# EAGLE board teensy-jst_01.2 v30 (EAGLE 9.7.0)
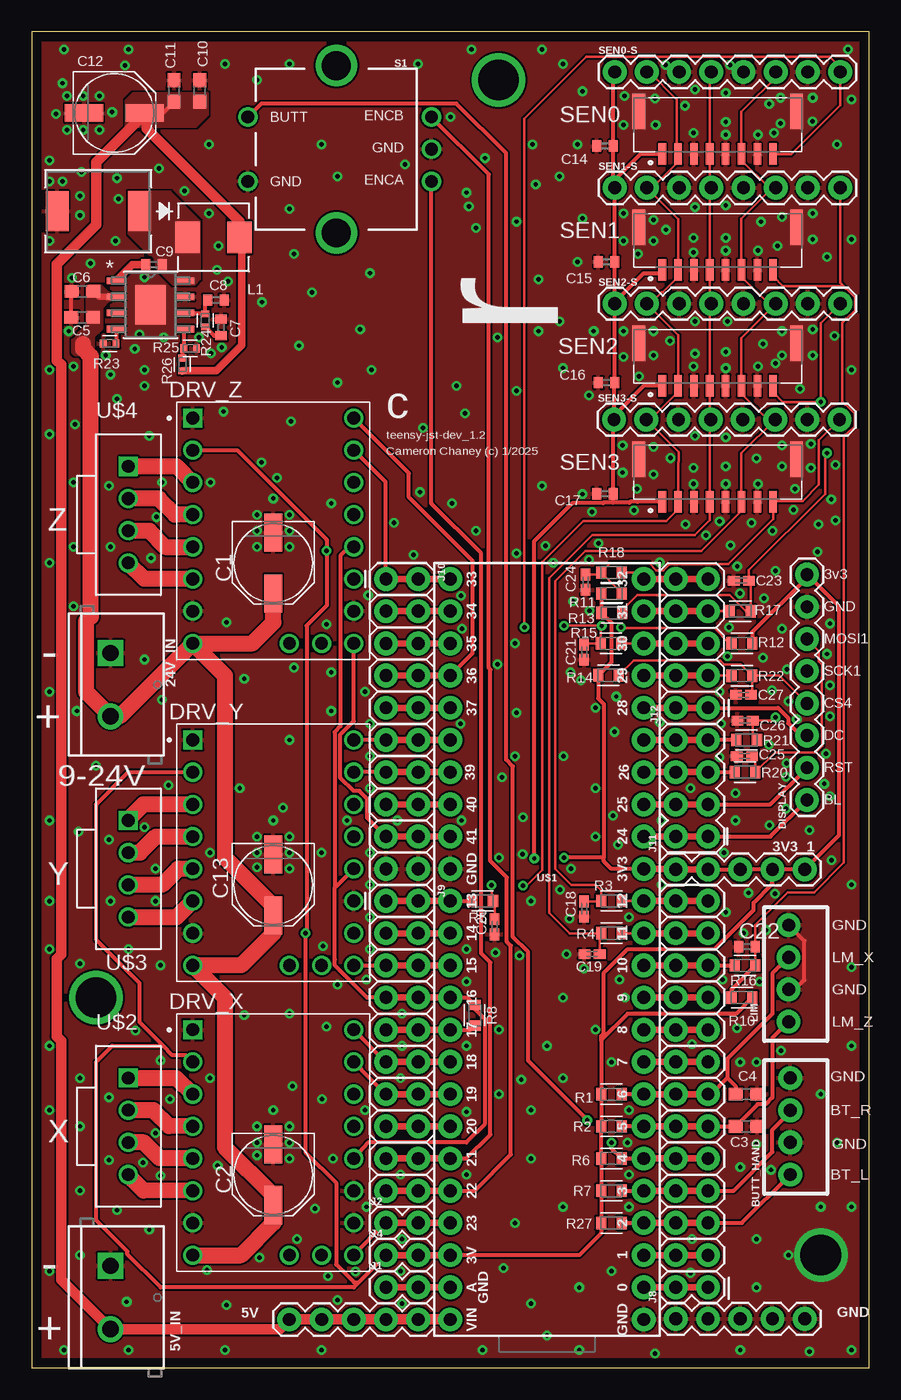
[diagram p0: board, top side]
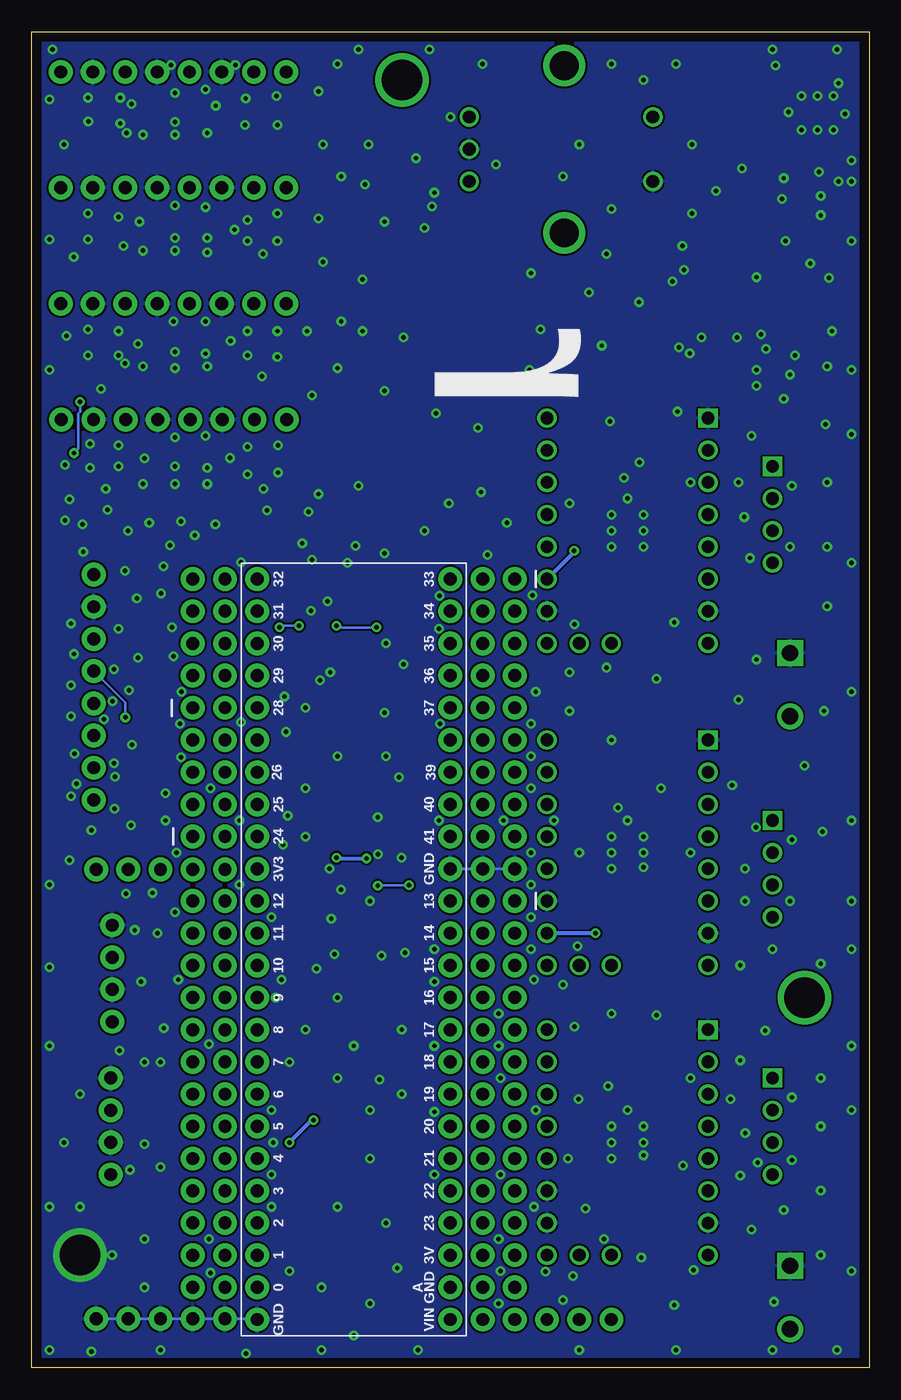
[diagram p1: board, bottom side, seen from below]

Size 66.04 x 105.41 mm. Coordinates in mm from the lower left corner, seen from the top.
Outline: 66.04,105.41 0,105.41 0,0 66.04,0 66.04,105.41
Copper layers (1*16): Top 0.035mm / dielectric 1.5mm / Bottom 0.035mm
Design rules "Fusion Electronics Design Rules *": minimum track width 6mil, minimum drill 0.35mm, track to track 6mil, track to pad 6mil, pad to pad 6mil, via to via 6mil, smd to smd 6mil, copper to edge 30mil, drill to drill 6mil, minimum pad ring 10mil, minimum via ring 8mil, stop-mask expansion 4mil, vias tented up to drill 0mil, thermal gap 6mil

## Footprints (pad centres in the part's own frame; a part is rotated, then mirrored left to right if it is on the bottom)
1X05 = drill 1.016 pad 1.88: 1 0,0; 2 2.54,0; 3 5.08,0; 4 7.62,0; 5 10.16,0
SCREWTERMINAL-5MM-2 = drill 1.3 pad 2.032 square: 1 0,0 | drill 1.3 pad 2.032: 2 5,0
1X04_NO_SILK = drill 1.016 pad 1.88: 1 0,0; 2 2.54,0; 3 5.08,0; 4 7.62,0
PANASONIC_D = smd 3 x 1.4: + 2.4,0; - -2.4,0
C0603 = smd 1.1 x 1: 1 -0.85,0; 2 0.85,0
C0402 = smd 0.7 x 0.9: 1 -0.65,0; 2 0.65,0
C0402K = smd 0.925 x 0.74: 1 -0.6,0; 2 0.6,0
SMC_DIO-L = smd 1.799 x 3.129: 1 -3.241,0; 2 3.241,0
1X08 = drill 1.016 pad 1.88: 1 0,0; 2 2.54,0; 3 5.08,0; 4 7.62,0; 5 10.16,0; 6 12.7,0; 7 15.24,0; 8 17.78,0
MODULE_TMC2209_BIGTREETECH = drill 1 square: 1 -6.35,8.89 | drill 1: 2 -6.35,6.35; 3 -6.35,3.81; 4 -6.35,1.27; 5 -6.35,-1.27; 6 -6.35,-3.81; 7 -6.35,-6.35; 8 -6.35,-8.89; 9 6.35,8.89; 10 6.35,6.35; 11 6.35,3.81; 12 6.35,1.27; 13 6.35,-1.27; 14 6.35,-3.81; 15 6.35,-6.35; 16 6.35,-8.89; 17 1.27,-8.89; 18 3.81,-8.89
1X02 = drill 1.016 pad 1.88: 1 0,0; 2 2.54,0
2X13 = drill 1.016 pad 1.88: 1 0,0; 2 0,2.54; 3 2.54,0; 4 2.54,2.54; 5 5.08,0; 6 5.08,2.54; 7 7.62,0; 8 7.62,2.54; 9 10.16,0; 10 10.16,2.54; 11 12.7,0; 12 12.7,2.54; 13 15.24,0; 14 15.24,2.54; 15 17.78,0; 16 17.78,2.54; 17 20.32,0; 18 20.32,2.54; 19 22.86,0; 20 22.86,2.54; 21 25.4,0; 22 25.4,2.54; 23 27.94,0; 24 27.94,2.54; 25 30.48,0; 26 30.48,2.54
2X10 = drill 1.016 pad 1.88: 1 0,0; 2 0,2.54; 3 2.54,0; 4 2.54,2.54; 5 5.08,0; 6 5.08,2.54; 7 7.62,0; 8 7.62,2.54; 9 10.16,0; 10 10.16,2.54; 11 12.7,0; 12 12.7,2.54; 13 15.24,0; 14 15.24,2.54; 15 17.78,0; 16 17.78,2.54; 17 20.32,0; 18 20.32,2.54; 19 22.86,0; 20 22.86,2.54
2X4 = drill 1.016 pad 1.88: 1 -3.81,-1.27; 2 -3.81,1.27; 3 -1.27,-1.27; 4 -1.27,1.27; 5 1.27,-1.27; 6 1.27,1.27; 7 3.81,-1.27; 8 3.81,1.27
2X5 = drill 1.016 pad 1.88: 1 0,0; 2 0,2.54; 3 2.54,0; 4 2.54,2.54; 5 5.08,0; 6 5.08,2.54; 7 7.62,0; 8 7.62,2.54; 9 10.16,0; 10 10.16,2.54
MWSA0503S-100MT = smd 1.9 x 2.499: 1 2.05,0; 2 -2.05,0
RESC1608X60 = smd 0.799 x 0.974: 1 -0.815,0; 2 0.815,0
RESC1005X40 = smd 0.535 x 0.644: 1 -0.507,0; 2 0.507,0
ROTARY_ENC_PLAIN = drill 1.016: A 7.493,-2.54; B 7.493,2.54; C 7.493,0; SW+ -6.985,2.54; SW- -6.985,-2.54 | drill 2.286: P$3 0,6.604; P$4 0,-6.604
JST_BM08B-GHS-TBT(LF)(SN)(N) = smd 0.6 x 1.7: 1 4.375,0; 2 3.125,0; 3 1.875,0; 4 0.625,0; 5 -0.625,0; 6 -1.875,0; 7 -3.125,0; 8 -4.375,0 | smd 1 x 2.8: P1 -6.225,-3.35; P2 6.225,-3.35
DDA8_3P1X2P4_TEX = smd 1.46 x 0.533: 1 -2.724,1.905; 2 -2.724,0.635; 3 -2.724,-0.635; 4 -2.724,-1.905; 5 2.724,-1.905; 6 2.724,-0.635; 7 2.724,0.635; 8 2.724,1.905 | smd 2.4 x 3.1: EPAD 0,0
TEENSY_EXTENDED = drill 1.016 pad 1.88: 0 7.62,-13.97; 1 7.62,-11.43; 2 7.62,-8.89; 3 7.62,-6.35; 3.3V@1 7.62,19.05; 3V -7.62,-11.43; 4 7.62,-3.81; 5 7.62,-1.27; 6 7.62,1.27; 7 7.62,3.81; 8 7.62,6.35; 9 7.62,8.89; 10 7.62,11.43; 11 7.62,13.97; 12 7.62,16.51; 13 -7.62,16.51; 14 -7.62,13.97; 15 -7.62,11.43; 16 -7.62,8.89; 17 -7.62,6.35; 18 -7.62,3.81; 19 -7.62,1.27; 20 -7.62,-1.27; 21 -7.62,-3.81; 22 -7.62,-6.35; 23 -7.62,-8.89; 24 7.62,21.59; 25 7.62,24.13; 26 7.62,26.67; 27 7.62,29.21; 28 7.62,31.75; 29 7.62,34.29; 30 7.62,36.83; 31 7.62,39.37; 32 7.62,41.91; 33 -7.62,41.91; 34 -7.62,39.37; 35 -7.62,36.83; 36 -7.62,34.29; 37 -7.62,31.75; 38 -7.62,29.21; 39 -7.62,26.67; 40 -7.62,24.13; 41 -7.62,21.59; AGND -7.62,-13.97; GND1 7.62,-16.51; GND2 -7.62,19.05; VIN -7.62,-16.51
HX25418-4A = drill 1 square: 1 0,3.81 | drill 1: 2 0,1.27; 3 0,-1.27; 4 0,-3.81

## Placement (x,y rotation side)
3V3_1  [1X05]  50.8,39.32 0 top
5V  [1X05]  20.32,3.81 0 top
5V_IN  [SCREWTERMINAL-5MM-2]  6.22,8.05 270 top
24V_IN  [SCREWTERMINAL-5MM-2]  6.22,56.39 270 top
BUTT_HAND  [1X04_NO_SILK]  59.82,15.24 90 top
C1  100uF/50V  [PANASONIC_D]  19.05,63.5 270 top
C2  100uF/50V  [PANASONIC_D]  19.05,15.24 270 top
C3  100nF  [C0603]  56.36,19.05 0 top
C4  100nF  [C0603]  56.36,21.59 0 top
C5  2.2uF  [C0603]  3.99,82.87 180 top
C6  2.2uF  [C0603]  4,84.91 180 top
C7  6.8nF  [C0402]  14.94,82.07 90 top
C8  39pF  [C0402]  14.53,84.23 0 top
C9  100nF  [C0402]  9.64,87.03 0 top
C10  47uF  [C0603]  13.26,100.74 90 top
C11  47uF  [C0603]  11.22,100.74 90 top
C12  100uF/50V  [PANASONIC_D]  6.53,99 0 top
C13  100uF/50V  [PANASONIC_D]  19.05,38.1 270 top
C14  100nF  [C0402]  45.21,96.39 180 top
C15  100nF  [C0402]  45.34,87.25 180 top
C16  100nF  [C0402]  45.34,77.72 180 top
C17  100nF  [C0402]  45.21,68.96 180 top
C18  100pF  [C0402K]  43.56,36.2 90 top  (not fitted)
C19  100pF  [C0402K]  44.2,32.64 0 top  (not fitted)
C20  100pF  [C0402K]  36.51,34.8 90 top  (not fitted)
C21  100pF  [C0402K]  43.56,56.46 90 top  (not fitted)
C22  100pF  [C0402]  56.4,33.22 0 top  (not fitted)
C23  100pF  [C0402K]  55.97,62.1 0 top  (not fitted)
C24  100pF  [C0402K]  43.69,61.98 90 top  (not fitted)
C25  100pF  [C0402K]  56.21,48.26 0 top  (not fitted)
C26  100pF  [C0402K]  56.26,51.05 0 top  (not fitted)
C27  100pF  [C0402K]  56.13,53.09 0 top  (not fitted)
CR1  B560C-13-FSMC_DIO-L  [SMC_DIO-L]  5.26,91.25 180 top
DISPLAY  [1X08]  61.15,62.58 270 top
DRV_X  TMC2209_BIGTREETECH  [MODULE_TMC2209_BIGTREETECH]  19.05,17.78 0 top
DRV_Y  TMC2209_BIGTREETECH  [MODULE_TMC2209_BIGTREETECH]  19.05,40.64 0 top
DRV_Z  TMC2209_BIGTREETECH  [MODULE_TMC2209_BIGTREETECH]  19.05,66.04 0 top
GND  [1X05]  50.8,3.86 0 top
J1  [1X02]  27.94,6.35 0 top
J2  [1X02]  27.94,11.43 0 top
J4  [1X02]  27.94,8.89 0 top
J8  [2X13]  53.34,6.35 90 top
J9  [2X10]  27.94,36.83 270 top
J10  [2X10]  27.94,62.23 270 top
J11  [2X4]  52.07,45.72 90 top
J12  [2X5]  53.34,52.07 90 top
L1  10uH  [MWSA0503S-100MT]  14.34,89.18 180 top
LIM  [1X04_NO_SILK]  59.69,27.3 90 top
R1  10k  [RESC1608X60]  45.72,21.59 180 top
R2  10k  [RESC1608X60]  45.72,19.05 180 top
R3  0R  [RESC1608X60]  45.72,36.83 0 top
R4  100  [RESC1608X60]  45.72,34.29 0 top
R5  100  [RESC1608X60]  35.56,36.83 180 top
R6  10k  [RESC1608X60]  45.72,16.51 180 top
R7  10k  [RESC1608X60]  45.72,13.97 180 top
R8  1k  [RESC1608X60]  34.92,27.81 90 top
R10  10k  [RESC1608X60]  56.01,29.21 180 top
R11  10k  [RESC1608X60]  45.72,61.09 0 top
R12  10k  [RESC1608X60]  56.01,57.15 180 top
R13  10k  [RESC1608X60]  45.75,59.56 0 top
R14  10k  [RESC1608X60]  45.49,54.64 0 top
R15  100  [RESC1608X60]  45.7,57.15 0 top
R16  100  [RESC1608X60]  56.26,31.75 180 top
R17  100  [RESC1608X60]  55.88,59.69 180 top
R18  100  [RESC1608X60]  45.72,62.74 0 top
R20  100  [RESC1608X60]  56.26,46.99 180 top
R21  100  [RESC1608X60]  56.39,49.53 180 top
R22  100  [RESC1608X60]  56.01,54.61 180 top
R23  100k  [RESC1005X40]  6.14,80.8 0 top
R24  13k  [RESC1005X40]  13.69,82.63 90 top
R25  51k  [RESC1005X40]  12.49,80.42 180 top
R26  270k  [RESC1005X40]  11.88,79.15 270 top
R27  10k  [RESC1608X60]  45.72,11.43 180 top
S1  ENCODER-SWITCH  [ROTARY_ENC_PLAIN]  24.03,96.14 0 top
SEN0  BM08B-GHS-TBT(LF)(SN)(N)  [JST_BM08B-GHS-TBT(LF)(SN)(N)]  54.1,95.76 180 top
SEN0-S  [1X08]  45.97,102.23 0 top
SEN1  BM08B-GHS-TBT(LF)(SN)(N)  [JST_BM08B-GHS-TBT(LF)(SN)(N)]  54.1,86.61 180 top
SEN1-S  [1X08]  45.97,93.09 0 top
SEN2  BM08B-GHS-TBT(LF)(SN)(N)  [JST_BM08B-GHS-TBT(LF)(SN)(N)]  54.1,77.47 180 top
SEN2-S  [1X08]  45.97,83.95 0 top
SEN3  BM08B-GHS-TBT(LF)(SN)(N)  [JST_BM08B-GHS-TBT(LF)(SN)(N)]  54.1,68.33 180 top
SEN3-S  [1X08]  45.93,74.8 0 top
U1  TPS54360DDARDDA8_3P1X2P4_TEX  [DDA8_3P1X2P4_TEX]  9.38,83.85 0 top
U$1  TEENSY_EXTENDEDW_SILK  [TEENSY_EXTENDED]  40.64,20.32 0 top
U$2  HX25418-4A  [HX25418-4A]  7.62,19.05 0 top
U$3  HX25418-4A  [HX25418-4A]  7.62,39.37 0 top
U$4  HX25418-4A  [HX25418-4A]  7.62,67.31 0 top

## Library data of the parts
3V3_1 5V GND J1 J2 J4 J8-J11 = SparkFun-Connectors
5V_IN 24V_IN = SparkFun-Connectors; SF_SKU: PRT-08432
BUTT_HAND LIM = SparkFun-Connectors; PROD_ID: CONN-09696
C1-C27 = rcl; SPICEPREFIX: C
CR1 = 2024-09-23_20-34-24_Library; COPYRIGHT: Copyright (C) 2024 Ultra Librarian. All rights reserved.; MANUFACTURER_PART_NUMBER: B560C-13-F; MFR_NAME: Diodes Inc
DISPLAY SEN0-S SEN1-S SEN2-S SEN3-S = SparkFun-Connectors; PROD_ID: CONN-08438
DRV_X DRV_Y DRV_Z = TMC2209_BIGTREETECH; AVAILABILITY: In Stock; CHECK_PRICES: https://www.snapeda.com/parts/TMC2209%20SILENTSTEPSTICK/Trinamic+Motion+Control+GmbH/view-part/?ref=eda; DESCRIPTION: TMC2209 Motor Controller/Driver Power Management Evaluation Board; MF: Trinamic Motion Control GmbH; MP: TMC2209 SILENTSTEPSTICK; PACKAGE: None; PRICE: None; SNAPEDA_LINK: https://www.snapeda.com/parts/TMC2209%20SILENTSTEPSTICK/Trinamic+Motion+Control+GmbH/view-part/?ref=snap
J12 = SparkFun-Connectors; PROD_ID: CONN-08499; SF_ID: PRT-0778
L1 = rcl-buck
R1-R8 R10-R18 R20-R27 = Resistor; CATEGORY: Resistor; SUB-CATEGORY: Fixed
S1 = SparkFun-Switches-Encoder; SF_SKU: COM-09117
SEN0 SEN1-SEN3 = BM08B-GHS-TBT_LF__SN__N_; AVAILABILITY: In Stock; CHECK_PRICES: https://www.snapeda.com/parts/BM08B-GHS-TBT(LF)(SN)(N)/JST+Sales+America+Inc./view-part/?ref=eda; DESCRIPTION: Connector Header Surface Mount 8 position 0.049 (1.25mm); MF: JST Sales; MP: BM08B-GHS-TBT(LF)(SN)(N); PACKAGE: None; PRICE: None; SNAPEDA_LINK: https://www.snapeda.com/parts/BM08B-GHS-TBT(LF)(SN)(N)/JST+Sales+America+Inc./view-part/?ref=snap
U1 = 2024-09-23_20-06-51_Library; COPYRIGHT: Copyright (C) 2024 Ultra Librarian. All rights reserved.; MANUFACTURER_PART_NUMBER: TPS54360DDAR; MFR_NAME: Texas Instruments
U$1 = TEENSY-4.1_CLEAN
U$2-U$4 = HX25418-4A

## Nets
+3V3: 3V3_1.1 3V3_1.2 3V3_1.3 3V3_1.4 3V3_1.5 C14.1 C15.1 C16.1 C17.1 DISPLAY.1 DRV_X.2 DRV_Y.2 DRV_Y.15 DRV_Z.2 DRV_Z.14 J4.1 J4.2 R1.2 R2.2 R6.2 R7.2 R10.1 R11.1 R12.1 R13.1 R14.1 R27.2 SEN0-S.1 SEN0.1 SEN1-S.1 SEN1.1 SEN2-S.1 SEN2.1 SEN3-S.1 SEN3.1 U$1.3.3V@1 U$1.3V
+5V: 5V.1 5V.2 5V.3 5V.4 5V.5 5V_IN.2 C10.1 C11.1 C12.+ L1.2 R26.2 U$1.VIN
+24V: 24V_IN.2 C1.+ C2.+ C5.1 C6.1 C13.+ DRV_X.8 DRV_Y.8 DRV_Z.8 U1.2
BL: DISPLAY.8 J11.1 J11.2 U$1.24
BUTT_ENC: J8.9 J8.10 R6.1 S1.SW+ U$1.4
BUTT_HAND_L: BUTT_HAND.1 J8.5 J8.6 R27.1 U$1.2
BUTT_HAND_R: BUTT_HAND.3 J8.7 J8.8 R7.1 U$1.3
CS0: C21.2 R12.2 R15.1 SEN0-S.8 SEN0.8
CS0_M: J12.5 J12.6 R15.2 U$1.30
CS1: C22.2 R10.2 R16.1 SEN1-S.8 SEN1.8
CS1_M: J8.21 J8.22 R16.2 U$1.10
CS2: C23.2 R13.2 R17.1 SEN2-S.8 SEN2.8
CS2_M: J12.7 J12.8 R17.2 U$1.31
CS3: C24.2 R11.2 R18.1 SEN3-S.8 SEN3.8
CS3_M: J12.9 J12.10 R18.2 U$1.32
CS4: C27.2 DISPLAY.5 R14.2 R22.1
CS4_M: J12.3 J12.4 R22.2 U$1.29
DC: DISPLAY.6 J12.1 J12.2 U$1.28
DIR_X: DRV_X.9 J9.11 J9.12 U$1.18
DIR_Y: DRV_Y.9 J10.11 J10.12 U$1.38
DIR_Z: DRV_Z.9 J10.7 J10.8 U$1.36
EN_X: DRV_X.16 J2.1 J2.2 U$1.23
EN_Y: DRV_Y.16 J9.5 J9.6 U$1.15
EN_Z: DRV_Z.16 J10.17 J10.18 U$1.41
ENCA: J9.17 J9.18 S1.A U$1.21
ENCB: J9.19 J9.20 S1.B U$1.22
GND: 5V_IN.1 24V_IN.1 BUTT_HAND.2 BUTT_HAND.4 C1.- C2.- C3.2 C4.2 C5.2 C6.2 C7.2 C8.2 C10.2 C11.2 C12.- C13.- C14.2 C15.2 C16.2 C17.2 C18.1 C19.1 C20.1 C21.1 C22.1 C23.1 C24.1 C25.1 C26.1 C27.1 CR1.2 DISPLAY.2 DRV_X.1 DRV_X.7 DRV_X.14 DRV_X.15 DRV_Y.1 DRV_Y.7 DRV_Y.14 DRV_Z.1 DRV_Z.7 DRV_Z.15 GND.1 GND.2 GND.3 GND.4 GND.5 J10.19 J10.20 LIM.2 LIM.4 R23.1 R25.1 S1.C S1.SW- SEN0-S.3 SEN0-S.5 SEN0-S.7 SEN0.3 SEN0.5 SEN0.7 SEN0.P1 SEN0.P2 SEN1-S.3 SEN1-S.5 SEN1-S.7 SEN1.3 SEN1.5 SEN1.7 SEN1.P1 SEN1.P2 SEN2-S.3 SEN2-S.5 SEN2-S.7 SEN2.3 SEN2.5 SEN2.7 SEN2.P1 SEN2.P2 SEN3-S.3 SEN3-S.5 SEN3-S.7 SEN3.3 SEN3.5 SEN3.7 SEN3.P1 SEN3.P2 U1.7 U1.EPAD U$1.GND1 U$1.GND2
LIM_X: C4.1 J8.13 J8.14 LIM.3 R1.1 U$1.6
LIM_Z: C3.1 J8.11 J8.12 LIM.1 R2.1 U$1.5
MISO: C18.2 R3.1 SEN0-S.6 SEN0.6 SEN1-S.6 SEN1.6 SEN2-S.6 SEN2.6 SEN3-S.6 SEN3.6
MISO1: J8.3 J8.4 U$1.1
MISO_M: J8.25 J8.26 R3.2 U$1.12
MOSI: C19.2 R4.1 SEN0-S.4 SEN0.4 SEN1-S.4 SEN1.4 SEN2-S.4 SEN2.4 SEN3-S.4 SEN3.4
MOSI1: C25.2 DISPLAY.3 R20.1
MOSI1_M: J11.5 J11.6 R20.2 U$1.26
MOSI_M: J8.23 J8.24 R4.2 U$1.11
MS1_Z: J10.9 J10.10 U$1.37
N$1: J10.15 J10.16 U$1.40
N$3: J9.3 J9.4 U$1.14
N$4: J1.1 J1.2 U$1.AGND
N$7: R23.2 U1.4
N$8: J8.15 J8.16 U$1.7
N$10: C7.1 R24.1
N$12: DRV_Z.6 U$4.4
N$14: C8.1 R24.2 U1.6
N$15: DRV_Z.5 U$4.3
N$17: DRV_X.6 U$2.4
N$18: DRV_X.5 U$2.3
N$19: R25.2 R26.1 U1.5
N$20: DRV_Z.4 U$4.2
N$21: DRV_Z.3 U$4.1
N$23: DRV_Y.4 U$3.2
N$24: DRV_X.4 U$2.2
N$25: DRV_X.3 U$2.1
N$26: J9.15 J9.16 U$1.20
N$28: J9.9 J9.10 R8.1 U$1.17
N$29: DRV_Y.3 U$3.1
N$30: C9.2 CR1.1 L1.1 U1.8
N$32: C9.1 U1.1
N$33: J8.17 J8.18 U$1.8
N$36: DRV_Y.6 U$3.4
N$37: J8.1 J8.2 U$1.0
N$38: DRV_Y.5 U$3.3
N$39: J8.19 J8.20 U$1.9
N$41: J10.5 J10.6 U$1.35
RST: DISPLAY.7 J11.3 J11.4 U$1.25
RX_X: DRV_X.13 DRV_Y.13 DRV_Z.13 J9.7 J9.8 R8.2 U$1.16
RX_Z: J10.3 J10.4 U$1.34
SCK: C20.2 R5.1 SEN0-S.2 SEN0.2 SEN1-S.2 SEN1.2 SEN2-S.2 SEN2.2 SEN3-S.2 SEN3.2
SCK1: C26.2 DISPLAY.4 R21.1
SCK1_M: J11.7 J11.8 R21.2 U$1.27
SCK_M: J9.1 J9.2 R5.2 U$1.13
STP_X: DRV_X.10 J9.13 J9.14 U$1.19
STP_Y: DRV_Y.10 J10.13 J10.14 U$1.39
STP_Z: DRV_Z.10 J10.1 J10.2 U$1.33

## Tracks (layer width: path | path; a pad name or v marks a point on that pad's centre or on a via)
+3V3  (via drill 0.35)
  Top 0.305: 3V3_1.2 3V3_1.3 3V3_1.4 | 3V3_1.4 3V3_1.5 63.63,41.99 63.63,60.09 DISPLAY.1 61.14,62.36 56.82,58.04 R12.1 56.74,57.06 | 44.91,25.86 R1.2 R2.2 R6.2 R7.2 R27.2 44.91,10.62 43.18,8.89 U$1.3V | U$1.3.3V@1 45.72,39.37 45.13,39.96 45.13,40.26 | 44.91,60.77 R11.1 44.94,61.06 R13.1 45.72,58.78 45.72,55.65 44.68,54.61 | R10.1 55.55,27.94 46.99,27.94 44.91,25.86 | J4.1 25.78,6.73 | 25.78,6.73 25.4,6.35 10.16,6.35 7.54,8.97 7.54,9.19 5.08,11.65 5.08,24.13 6.35,25.4 10.36,25.4 | 10.36,25.4 11.09,24.67 12.11,24.67 DRV_X.2 | DRV_Y.2 7.62,46.99 5.08,44.45 5.08,33.77 8.51,30.34 8.51,27.25 10.36,25.4 | 44.91,25.86 44.91,26.16 45.13,26.39 45.13,31.16 47.02,33.05 53.86,33.05 56.93,36.12 56.93,36.69 58.42,38.18 3V3_1.4 | R14.1 44.68,54.61 | 44.68,54.61 44.68,52.81 45.13,52.35 45.13,40.26 | 45.93,83.9 SEN2-S.1 45.97,87.23 C15.1 45.99,93.08 SEN1-S.1 | SEN2.1 48.26,77.47 45.93,75.14 | 45.93,75.14 45.93,74.93 | SEN1.1 49.47,86.36 48.26,86.36 45.93,84.03 45.93,83.9 | SEN0.1 48.01,95.76 45.97,93.73 SEN1-S.1 | SEN1-S.1 45.86,93.2 C14.1 45.86,102.12 SEN0-S.1 | SEN3-S.1 45.93,74.93 | 45.93,75.14 45.93,77.66 C16.1 45.99,83.84 45.93,83.9 | 45.86,68.25 C17.1 45.86,74.86 45.93,74.93 | 45.13,40.26 v41.99,40.26 | 45.86,68.25 45.08,68.25 45.04,68.21 42.65,68.21 39.61,65.17 39.61,40.24 39.63,40.21 v39.63,40.19 | DRV_Z.2 16.21,72.39 23.25,65.34 v23.25,64.45 23.25,60.13 21.67,58.55 21.67,34.29 v21.59,34.29 21.59,17.02 24.01,14.6 24.01,8.16 25.43,6.73 25.78,6.73 | 45.86,68.25 47.13,68.25 47.21,68.33 47.78,68.33 47.79,68.33 SEN3.1
  Top 0.508: U$1.3.3V@1 50.75,39.37 3V3_1.1 3V3_1.2 | J4.1 J4.2 U$1.3V
  Bottom 0.305: v21.59,34.29 DRV_Y.15 | v41.99,40.26 41.91,40.26 41.84,40.19 v39.63,40.19 | DRV_Z.14 23.25,64.38 v23.25,64.45
+5V
  Top 0.305: 11.22,100.11 C11.1 10.33,99 9.06,99
  Top 0.61: L1.2 16.56,89.01 16.56,80.7 14.54,78.68 11.92,78.68 R26.2
  Top 0.813: U$1.VIN 5V.5 5V.4 5V.3 5V.2 5V.1 19.56,3.05 5V_IN.2 2.33,6.94 2.33,25.79 1.96,26.16 1.96,32.27 2.33,32.63 2.33,79.13 1.98,79.47 1.98,87.07 5.08,90.17 5.08,95.12 8.95,99 C12.+ 9.06,99 9.06,97.77 16.39,90.45 L1.2
  pour Top (isolate 0.254, no thermals): 7.36,97.9 12.97,97.9 13.94,98.87 13.94,100.54 7.95,100.54 7.36,99.95
+24V
  Top 0.305: 4.87,82.83 C5.1
  Top 0.508: C6.1 5.28,84.49 U1.2
  Top 1.27: 4.06,80.77 4.06,80.39 4.67,79.78 4.67,59.26 4.29,58.88 4.29,53.32 24V_IN.2 6.94,51.39 DRV_Z.8 | DRV_Z.8 17.4,57.15 19.05,58.8 C1.+ | DRV_Z.8 15.24,54.61 15.24,40.26 19.05,36.45 C13.+ 19.05,34.29 16.51,31.75 DRV_Y.8 15.24,29.21 15.24,17.4 19.05,13.59 C2.+ 19.05,11.43 16.51,8.89 DRV_X.8
  pour Top (isolate 0.254, no thermals): 4.62,82.17 4.56,82.08 3.5,81.02 3.5,80.2 4.6,80.2 4.6,81.37 4.62,81.47 4.68,81.56 5.23,82.12 5.23,83.65 5.26,83.76 5.31,83.85 5.89,84.43 5.99,84.49 6,84.49 5.99,84.49 5.89,84.54 5.34,85.1 4.65,85.1 4.65,82.28
BL
  Top 0.305: J11.1 58.25,41.91 DISPLAY.8
  Top 0.508: U$1.24 J11.2 J11.1
BUTT_ENC  (via drill 0.35)
  Top 0.305: U$1.4 R6.1 45.72,17.32 v45.72,17.78 | S1.SW+ 18.12,99.75 33.5,99.75 37.42,95.83 37.42,47.98 37.94,47.46 37.94,34.01 39.15,32.8 39.15,24.22 v43.81,19.56
  Top 0.508: U$1.4 J8.10 J8.9
  Bottom 0.305: v45.72,17.78 43.94,19.56 v43.81,19.56
BUTT_HAND_L
  Top 0.305: J8.5 56.01,11.43 BUTT_HAND.1 | R27.1 U$1.2
  Top 0.508: U$1.2 J8.6 J8.5
BUTT_HAND_R
  Top 0.305: R7.1 U$1.3 | J8.7 55.36,13.97 58.42,17.03 58.42,18.78 59.82,20.18 BUTT_HAND.3
  Top 0.508: J8.7 J8.8 U$1.3
CS0  (via drill 0.35)
  Top 0.203: v38.86,58.42 38.86,98.55 43.74,103.43 62.94,103.43 63.75,102.62 SEN0-S.8 63.75,99.6 59.91,95.76 SEN0.8 | R12.2 55.03,57.15 53.83,58.34 46.56,58.34 v46.48,58.42 | v41.99,58.55 v44.96,58.55 44.88,58.47 R15.1 43.65,57.15 C21.2
  Bottom 0.203: v38.86,58.42 41.86,58.42 v41.99,58.55 | v44.96,58.55 46.36,58.55 v46.48,58.42
CS0_M
  Top 0.203: R15.2 U$1.30
  Top 0.508: J12.5 J12.6 U$1.30
CS1
  Top 0.203: 64.01,85.34 59.24,85.34 58.48,86.11 SEN1.8 | SEN1-S.8 63.75,85.6 64.01,85.34 | 64.01,85.34 64.21,85.14 64.25,85.14 64.95,84.44 64.95,83.45 64.25,82.75 64.21,82.75 63.93,82.47 63.93,76.23 64.16,76 64.2,76 64.9,75.3 64.9,74.31 64.2,73.61 64.16,73.61 64.04,73.48 64.04,39.86 61.7,37.52 59.61,37.52 57.05,34.96 C22.2 57.08,33.2 R16.1
  Top 0.305: R16.1 55.19,29.87 R10.2
CS1_M
  Top 0.305: J8.21 R16.2
  Top 0.508: U$1.10 J8.22 J8.21
CS2  (via drill 0.35)
  Top 0.203: SEN2-S.8 62.23,82.42 v62.23,76.2 59.24,76.2 58.48,76.96 SEN2.8 | R13.2 46.57,59.77 47.75,60.96 55.04,60.96 56.31,59.69 R17.1 56.69,61.98 C23.2 56.57,62.92 62.58,68.93 62.58,72.04 v62.71,72.17
  Bottom 0.203: v62.23,76.2 62.23,75.43 62.36,75.3 62.36,72.51 v62.71,72.17
CS2_M
  Top 0.203: R17.2 J12.7
  Top 0.508: U$1.31 J12.8 J12.7
CS3
  Top 0.203: SEN3-S.8 62.08,73.17 62.08,69.68 60.8,68.4 58.55,68.4 SEN3.8 58.48,66.95 54.95,63.42 50.31,63.42 49.79,62.91 49.27,62.91 48.7,63.48 45.65,63.48 R18.1 | R18.1 46.53,61.11 R11.2 | C24.2 44.74,62.58 R18.1
CS3_M
  Top 0.203: R18.2 47.75,62.74
  Top 0.508: J12.9 J12.10 U$1.32 47.75,62.74
CS4
  Top 0.203: R14.2 47.47,55.8 54.3,55.8 54.6,55.5 55.93,55.5 R22.1 | R22.1 58.96,54.61 DISPLAY.5 | C27.2 56.82,53.17 R22.1
CS4_M
  Top 0.203: R22.2 J12.3
  Top 0.508: U$1.29 J12.4 J12.3
DC
  Top 0.305: J12.1 58.86,52.07 59.65,51.28 59.65,50.87 60.64,49.88 DISPLAY.6
  Top 0.508: U$1.28 J12.2 J12.1
DIR_X
  Top 0.305: DRV_X.9 27.89,24.13 J9.11
  Top 0.508: J9.11 J9.12 U$1.18
DIR_Y
  Top 0.305: J10.11 DRV_Y.9
  Top 0.508: U$1.38 J10.12 J10.11
DIR_Z
  Top 0.305: U$1.36 33.02,54.63 34.77,56.38 34.77,63.66 29.74,68.69 29.74,70.59 DRV_Z.9
  Top 0.508: U$1.36 J10.8 J10.7
EN_X
  Top 0.305: DRV_X.16 27.83,11.43 J2.1
  Top 0.508: J2.1 J2.2 U$1.23
EN_Y
  Top 0.305: DRV_Y.16 J9.5
  Top 0.508: J9.5 J9.6 U$1.15
EN_Z
  Top 0.305: J10.17 26.46,43.39 26.46,44.89 25.84,45.51 25.38,45.51 24.34,46.55 24.34,49.97 25.4,51.03 DRV_Z.16
  Top 0.508: J10.17 J10.18 U$1.41
ENCA
  Top 0.305: U$1.21 34.29,16.51 36.17,18.39 36.17,31.98 35.45,32.71 35.45,64.28 31.53,68.2 S1.A
  Top 0.508: J9.17 J9.18 U$1.21
ENCB
  Top 0.305: U$1.22 34.92,13.97 37.78,16.83 37.78,33.3 37.47,33.62 37.47,38.69 36.18,39.98 36.18,55.09 36.05,55.22 36.05,94.16 S1.B
  Top 0.508: U$1.22 J9.20 J9.19
GND  (via drill 0.35, 3.2)
  Top 0.203: C10.2 13.26,101.27
  Top 0.305: C5.2 3.13,84.89 C6.2 | LIM.2 60.18,29.84 60.94,30.6 60.94,33.68 LIM.4
  Bottom 0.203: J10.19 J10.20 U$1.GND2 | U$1.GND1 48.31,3.86 GND.1 GND.2 GND.3 GND.4 GND.5
  other vias: 8.89,55.88 41.91,22.86 39.37,16.51 39.37,5.08 14.15,80.04 55.88,15.83 58.55,97.41 54.74,98.3 54.74,89.15 52.2,89.15 58.8,88.52 58.67,79.25 54.74,80.14 52.32,80.01 54.74,71.12 52.2,70.99 60.2,69.34 63.5,96.52 55.63,26.8 8.89,77.47 34.16,75.31 20.32,102.87 40.26,69.6 15.11,75.44 64.65,38.1 64.65,12.7 64.65,25.4 29.42,94.95 33.49,77.47 13.97,96.52 8.89,78.74 34.29,92.71 26.67,86.36 41.91,102.87 19.05,20.32 23.24,58.67 20.32,27.94 62.23,8.89 59.1,25.02 62.72,87.63 4.64,87.14 34.47,91.62 39.96,85.85 39.96,81.79 41.63,93.98 41.63,82.55 20.91,10.16 57.15,24.13 55.88,24.13 62.23,21.59 63.5,17.78 62.23,12.7 59.69,8.89 57.15,6.35 57.15,10.16 41.91,12.7 38.1,11.43 39.37,20.32 36.86,26.67 34.29,33.02 34.29,30.48 41.91,29.21 42.16,32.64 39.37,36.83 40.64,25.4 44.45,26.67 45.72,24.13 46.79,29.21 45.72,7.62 43.18,6.35 40.64,2.54 35.56,1.39 22.86,1.39 55.88,1.39 43.18,1.39 64.65,1.39 15.24,1.39 7.62,1.39 2.54,1.39 3.81,8.89 3.81,13.97 3.81,19.05 3.81,22.86 1.39,20.32 1.39,25.4 1.39,7.62 1.39,73.66 1.39,63.5 1.39,53.34 1.39,43.18 1.39,36.83 1.39,33.02 1.39,78.74 1.39,95.25 2.54,104.02 7.62,104.02 15.24,102.87 17.78,101.6 24.13,93.98 22.86,96.52 20.32,91.44 30.48,102.87 38.61,22.73 45.97,50.16 45.85,43.56 46.1,52.96 44.45,52.07 44.45,45.72 44.45,41.91 38.1,48.26 56.77,66.67 55.12,64.9 60.07,67.69 58.67,62.87 57.66,56.01 54.25,48.16 54.36,50.8 55.5,45.34 55.5,43.18 46.23,41.27 49.66,43.18 61.98,64.39 64.65,31.62 64.65,78.74 64.64,89.03 64.65,100.08 64.39,104.02 40.26,104.02 34.67,104.02 47.88,78.23 41.91,78.87 44.32,81.79 43.05,87.25 43.43,90.68 50.04,89.79 57.66,80.77 57.53,90.42 47.75,69.34 57.15,71.75 60.58,77.22 57.75,60.71 30.1,64.14 23.62,54.86 23.62,51.82 24.13,30.23 22.99,33.27 23.24,26.92 20.57,22.23 19.81,44.2 10.16,31.75 7.62,33.02 3.68,42.29 3.81,31.88 5.08,47.5 9.27,10.92 6.73,12.45 10.92,21.21 9.78,36.83 9.78,39.37 10.29,69.85 9.27,73.53 6.73,93.85 6.6,88.9 14.6,86.61 13.97,91.06 10.03,94.61 8.13,80.39 10.41,81.28 14.99,80.52 15.49,85.72 14.73,88.52 6.86,92.2 3.94,94.36 3.81,90.93 7.37,102.74 6.35,99.06 2.41,101.35 12.06,92.84 20.7,87.88 18.16,84.07 25.91,81.92 24.13,77.72 21.08,80.64 20.45,74.68 33.15,68.2 26.8,78.74 56.13,34.29 56.52,37.47 54.74,35.94 46.74,100.33 58.17,99.69 49.02,70.48 49.02,72.64 59.18,72.77 59.18,71.12 61.59,81.92 61.59,79.88 59.18,79.88 59.18,81.79 49.02,81.79 49.02,79.88 49.02,88.9 49.02,90.55 61.59,91.06 61.59,89.03 59.18,90.81 61.59,100.2 59.05,100.2 59.05,98.17 49.21,98.04 49.16,100.15 2.41,93.6 1.39,93.6 1.39,88.9 3.81,92.46 8.51,81.53 8.89,86.05 13.21,81.28 57.28,88.14 54.74,88.14 52.2,88.01 52.2,97.41 54.74,97.28 57.28,97.28 57.28,78.99 54.74,78.87 52.2,78.99 57.28,69.72 54.74,69.72 52.2,69.72 46.61,72.77 47.8,87.88 46.66,98.04 46.61,70.63 46.67,88.9 46.67,91.06 46.67,79.76 46.67,81.79 43.05,96.52 43.43,100.71 43.94,76.71 38.23,51.69 38.23,64.26 38.23,77.09 38.23,90.42 36.86,40.26 33.83,50.8 35.74,95.43 43.57,31.5 42.49,54.86 44.01,59.71 36.59,32.77 38.47,32.51 38.75,43.43 36.73,55.5 36.73,81.28 54.23,53.34 58.13,49.15 42.7,60.46 43.31,54.23 59.54,47.69 62.04,66.55 58.2,42.82 59.5,44.12 59.48,46.64 62.5,46.06 59.18,58.29 9.84,67.12 9.4,63.88 8.9,42.66 10.16,15.17 8.78,16.19 9.77,18.51 63.07,40.05 8.19,26.61 20.32,49.53 22.86,40.64 38.1,57.15 30.84,74.17 43.43,68.93 33.87,60.92 33.93,58.32 33.91,43.18 37.08,46.61 28.57,66.67 34.29,15.24 34.29,20.19 34.29,25.4 22.91,21.21 36.86,21.59 10.16,24.26 10.79,45.97 10.29,52.7 14.1,69.85 52.32,73.53 54.74,73.41 52.32,82.55 54.86,82.55 52.32,91.57 54.74,91.69 52.32,100.84 54.74,100.58 47.12,15.24 47.12,12.7 46.99,17.78 47.12,20.32 46.35,30.61 47.12,35.56 54.61,40.64 58.29,15.62 26.29,53.34 26.54,60.96 23.62,68.2 26.67,35.56 26.67,33.02 26.67,38.1 26.67,40.64 24.85,43.18 26.67,48.26 26.67,45.72 26.67,50.8 16.41,45.72 14.07,40.64 14.07,22.86 13.83,7.72 17.97,8.7 20.32,19.05 20.32,17.78 20.32,16.51 17.78,17.78 17.78,19.05 20.32,39.37 20.32,40.64 20.32,41.91 17.78,41.91 17.78,40.64 19.05,43.18 20.32,64.77 20.32,66.04 20.32,67.31 17.78,67.31 17.78,66.04 17.78,64.77 19.05,68.58 18.11,71.45 19.33,70.23 14.67,15.94 17.78,16.76 17.78,39.5 5.33,100.33 4.06,100.33 2.79,100.33 2.79,97.66 4.06,97.66 5.33,97.66 1.9,98.93 61.58,98.32 55.06,102.77 49.98,102.77 39.49,96.52 51.52,99.57 63.3,81.41 63.41,71.25 63.41,66.85 62.95,58.72 62.95,53.85 62.95,51.41 60.34,51.15 62.95,45.09 63.06,68.51 61.44,70.99 61.44,72.9 58.44,66.02 38.72,40.51 40.51,64.86 47.5,67.65 44.2,67.52 41.94,48.26 58.61,37.4 50.39,71.77 62.72,56.31 62.65,48.46 58.37,53.45 50.34,81.03 55.85,61.09 59.67,52.6 59.56,55.12 55.64,63.23 41.13,63.52 49.53,63.54 44.7,65.06 53.18,65.69 54.26,66.77 51.56,66.55 43.94,63.75 54.48,30.61 57.4,30.48 57.91,34.54 42.42,35.43 41.66,37.72 42.55,39.37 49.66,38.1 28.83,43.18 26.29,20.32 23.75,16.51 20.7,55.24 15.37,58.8 16.76,54.36 16.76,27.81 37.21,7.87 39.75,93.34 35.05,89.92 22.1,84.84 29.21,5.08 29.08,7.62 29.21,10.16 25.53,7.61 29.08,15.24 29.08,22.86 29.21,25.4 29.21,27.94 26.42,30.61 54.99,58.42 49.53,50.93 51.94,45.72 61.34,42.42 52.07,25.53 57.15,17.65 61.34,1.27 49.15,1.14 30.61,69.09 35.05,66.04 3.56,51.82 2.92,81.79 3.17,85.98 6.73,76.45 6.22,78.36 3.3,60.07 3.3,78.99 3.3,69.85 3.3,64.77 3.43,74.42 5.84,79.88 23.37,7.24 6.1,41.66 6.22,36.83 6.1,21.34 6.1,16.38 6.1,69.6 6.22,64.77 51.94,7.49 52.07,10.16 54.86,56.13 33.02,98.68 15.37,4.95 24.13,5.33 7.49,5.21 26.42,12.7 22.35,12.57
  pour Top (rank 2): -6.29,-6.2 77.32,-6.2 77.32,110.34 -7.47,110.34 -7.47,-5.02
  pour Bottom: -8.83,-11.28 82.4,-11.28 82.4,109.16 81.22,110.34 -10.01,110.34 -10.01,-10.1
LIM_X
  Top 0.305: 54.86,22.86 54.86,24.38 58.42,27.94 58.42,31.11 LIM.3 | U$1.6 R1.1 | 53.59,21.59 54.86,22.86 | 54.86,22.86 55.51,22.21 C4.1
  Top 0.508: U$1.6 J8.14 J8.13 53.59,21.59
LIM_Z
  Top 0.305: U$1.5 R2.1 | J8.11 C3.1 57.25,20.79 57.89,20.79 58.42,21.32 58.42,26.04 LIM.1
  Top 0.508: J8.11 J8.12 U$1.5
MISO
  Top 0.203: SEN1-S.6 58.42,93.09 | 58.42,93.09 58.17,93.09 55.98,95.28 SEN0.6 55.98,99.08 59,102.11 58.88,102.23 SEN0-S.6 | 58.42,93.09 55.98,90.65 SEN1.6 55.98,86.1 58.13,83.95 SEN2-S.6 55.98,81.25 SEN2.6 55.98,76.87 58.04,74.8 SEN3-S.6 55.98,72.15 SEN3.6 55.98,67.59 52.81,64.43 43.66,64.43 41.3,62.07 41.3,39.34 42.55,38.1 44.45,38.1 44.91,37.65 R3.1 44.87,36.8 C18.2
MISO1
  Top 0.508: J8.3 J8.4 U$1.1
MISO_M
  Top 0.203: R3.2 U$1.12
  Top 0.508: U$1.12 J8.26 J8.25
MOSI
  Top 0.203: 53.48,92.97 53.48,92.71 | 53.48,92.71 SEN1.4 53.48,84.06 SEN2-S.4 53.48,83.83 SEN2.4 53.48,74.87 | 53.48,74.87 SEN3.4 53.48,66.88 52.29,65.69 44.2,65.69 40.82,62.32 40.82,35.89 42.42,34.29 R4.1 44.8,34.18 C19.2 | SEN3-S.4 53.48,74.87 | SEN0-S.4 53.48,102.12 SEN0.4 53.48,93.21 SEN1-S.4 53.59,92.83 53.48,92.71
MOSI1
  Top 0.203: DISPLAY.3 61.09,57.5 62.06,56.54 62.06,56.08 62.06,55.88 62.06,55.74 62.34,55.46 62.34,54.47 62.32,54.45 62.32,52.94 62.34,52.92 62.34,51.93 62.32,51.91 62.32,50.4 62.34,50.38 62.34,49.04 61.83,48.54 58.62,48.54 R20.1 | 57.11,47.03 R20.1 | C25.2 57.08,47.99 R20.1
MOSI1_M
  Top 0.305: J11.5 R20.2
  Top 0.508: J11.5 J11.6 U$1.26
MOSI_M
  Top 0.203: R4.2 U$1.11
  Top 0.508: U$1.11 J8.24 J8.23
  Bottom 0.508: 48.23,34.31 U$1.11
MS1_Z
  Top 0.508: J10.9 J10.10 U$1.37
N$1
  Top 0.508: J10.15 J10.16 U$1.40
N$3
  Top 0.508: J9.3 J9.4 U$1.14
N$4
  Top 0.508: U$1.AGND J1.2 J1.1
N$5  (via drill 3.2)
  other vias: 5.08,29.21
N$7
  Top 0.305: R23.2 U1.4
N$8
  Top 0.508: U$1.7 J8.16 J8.15
N$9  (via drill 3.2)
  other vias: 36.83,101.6
N$10
  Top 0.305: R24.1 14.39,81.42 C7.1
N$12
  Top 1.27: U$4.4 8.9,62.23 DRV_Z.6
N$14
  Top 0.305: U1.6 13.61,83.22 R24.2 13.69,84.05 C8.1
N$15
  Top 1.27: DRV_Z.5 10.55,64.77 9.28,66.04 U$4.3
N$17
  Top 1.27: DRV_X.6 8.81,14 7.62,15.19 U$2.4
N$18
  Top 1.27: DRV_X.5 10.08,16.54 8.84,17.78 U$2.3
N$19
  Top 0.305: U1.5 11.99,81.83 R25.2 11.88,80.32 R26.1
N$20
  Top 1.27: DRV_Z.4 11.3,67.31 10.03,68.58 U$4.2
N$21
  Top 1.27: DRV_Z.3 11.43,71.12 U$4.1
N$23
  Top 1.27: U$3.2 8.53,40.64 9.8,41.91 DRV_Y.4
N$24
  Top 1.27: DRV_X.4 10.84,19.08 9.6,20.32 U$2.2
N$25
  Top 1.27: DRV_X.3 11.38,22.86 U$2.1
N$26
  Top 0.508: J9.15 J9.16 U$1.20
N$28
  Top 0.305: U$1.17 34.6,26.67 R8.1
  Top 0.508: J9.9 J9.10 U$1.17
N$29
  Top 1.27: DRV_Y.3 8.8,44.45 7.62,43.27 U$3.1
N$30
  pour Top (isolate 0.254, no thermals): 9.77,87.33 9.78,87.3 9.78,86.81 11.13,85.45 12.84,85.45 13.31,85.92 13.31,90.43 10.94,92.79 7.62,92.79 7.62,89.47
N$32
  Top 0.61: C9.1 7.93,87.03 U1.1
N$33
  Top 0.508: U$1.8 J8.18 J8.17
N$36
  Top 1.27: DRV_Y.6 11.43,35.56 U$3.4
N$37
  Top 0.508: U$1.0 J8.2 J8.1
N$38
  Top 1.27: DRV_Y.5 11.56,39.37 10.29,38.1 U$3.3
N$39
  Top 0.508: U$1.9 J8.20 J8.19
N$41
  Top 0.508: J10.5 J10.6 U$1.35
RST
  Top 0.305: J11.3 58.25,44.45 DISPLAY.7
  Top 0.508: U$1.25 J11.4 J11.3
RX_X
  Top 0.305: U$1.16 34.34,29.21 R8.2 34.92,28.32 35.72,27.52 35.72,19.21 34.29,17.78 26.56,17.78 DRV_X.13 | DRV_Y.13 23.88,37.85 | DRV_Z.13 25.05,64.77 24.34,64.07 24.34,50.62 23.88,50.16 23.88,37.85 | J9.7 26.44,29.21 23.92,31.73 23.92,32.19 23.88,32.22 23.88,37.85
  Top 0.508: U$1.16 J9.8 J9.7
RX_Z
  Top 0.508: U$1.34 J10.4 J10.3
SCK  (via drill 0.35)
  Top 0.203: v38.75,38.05 39.03,38.05 40.26,39.28 40.26,63.55 43.5,66.79 50.02,66.79 50.98,67.74 SEN3.2 50.98,71.45 51.03,71.5 51.03,72.24 SEN3-S.2 48.77,74.8 50.98,77.01 SEN2.2 50.98,81.48 SEN2-S.2 48.77,83.95 49.7,84.88 49.75,84.88 50.98,86.1 SEN1.2 50.98,90.63 SEN1-S.2 48.77,93.34 49.17,93.34 50.98,95.15 SEN0.2 50.89,95.84 50.89,100.03 48.69,102.23 SEN0-S.2 | C20.2 36.51,36.7 R5.1 36.28,36.93 v36.28,38.07
  Bottom 0.203: v36.28,38.07 38.73,38.07 v38.75,38.05
SCK1  (via drill 0.35)
  Top 0.203: R21.1 56.86,49.87 C26.2 58.41,51.05 v58.66,51.31
  Bottom 0.203: v58.66,51.31 58.66,52.48 DISPLAY.4
SCK1_M
  Top 0.305: R21.2 J11.7
  Top 0.508: U$1.27 J11.8 J11.7
SCK_M
  Top 0.305: U$1.13 R5.2
  Top 0.508: J9.1 J9.2 U$1.13
STP_X
  Top 0.305: DRV_X.10 27.89,21.59 J9.13
  Top 0.508: J9.13 J9.14 U$1.19
STP_Y
  Top 0.305: J10.13 DRV_Y.10
  Top 0.508: J10.13 J10.14 U$1.39
STP_Z
  Top 0.305: J10.1 27.89,62.28 27.89,69.9 DRV_Z.10
  Top 0.508: J10.1 J10.2 U$1.33

## Text on the board
tPlace: BUTT | ENCB | GND | GND | ENCA | r | c | teensy-jst-dev_1.2 | Cameron Chaney (c) 1/2025 | Z | 3v3 | GND | MOSI1 | - | SCK1 | CS4 | + | DC | 9-24V | RST | BL | Y | GND | LM_X | GND | LM_Z | GND | BT_R | X | GND | BT_L | - | +
bPlace: r